# Altium PCB atmega_programmer.PcbDoc
Units mil, origin at the board's own origin, x right, y up, seen from the top; angles counter-clockwise.
Board outline 2649.21 x 2337.01 mil, 2 copper layers (Top, Bottom), stack 61.811 mil thick; 12 components, 38 nets, 110 pads, 0 vias.
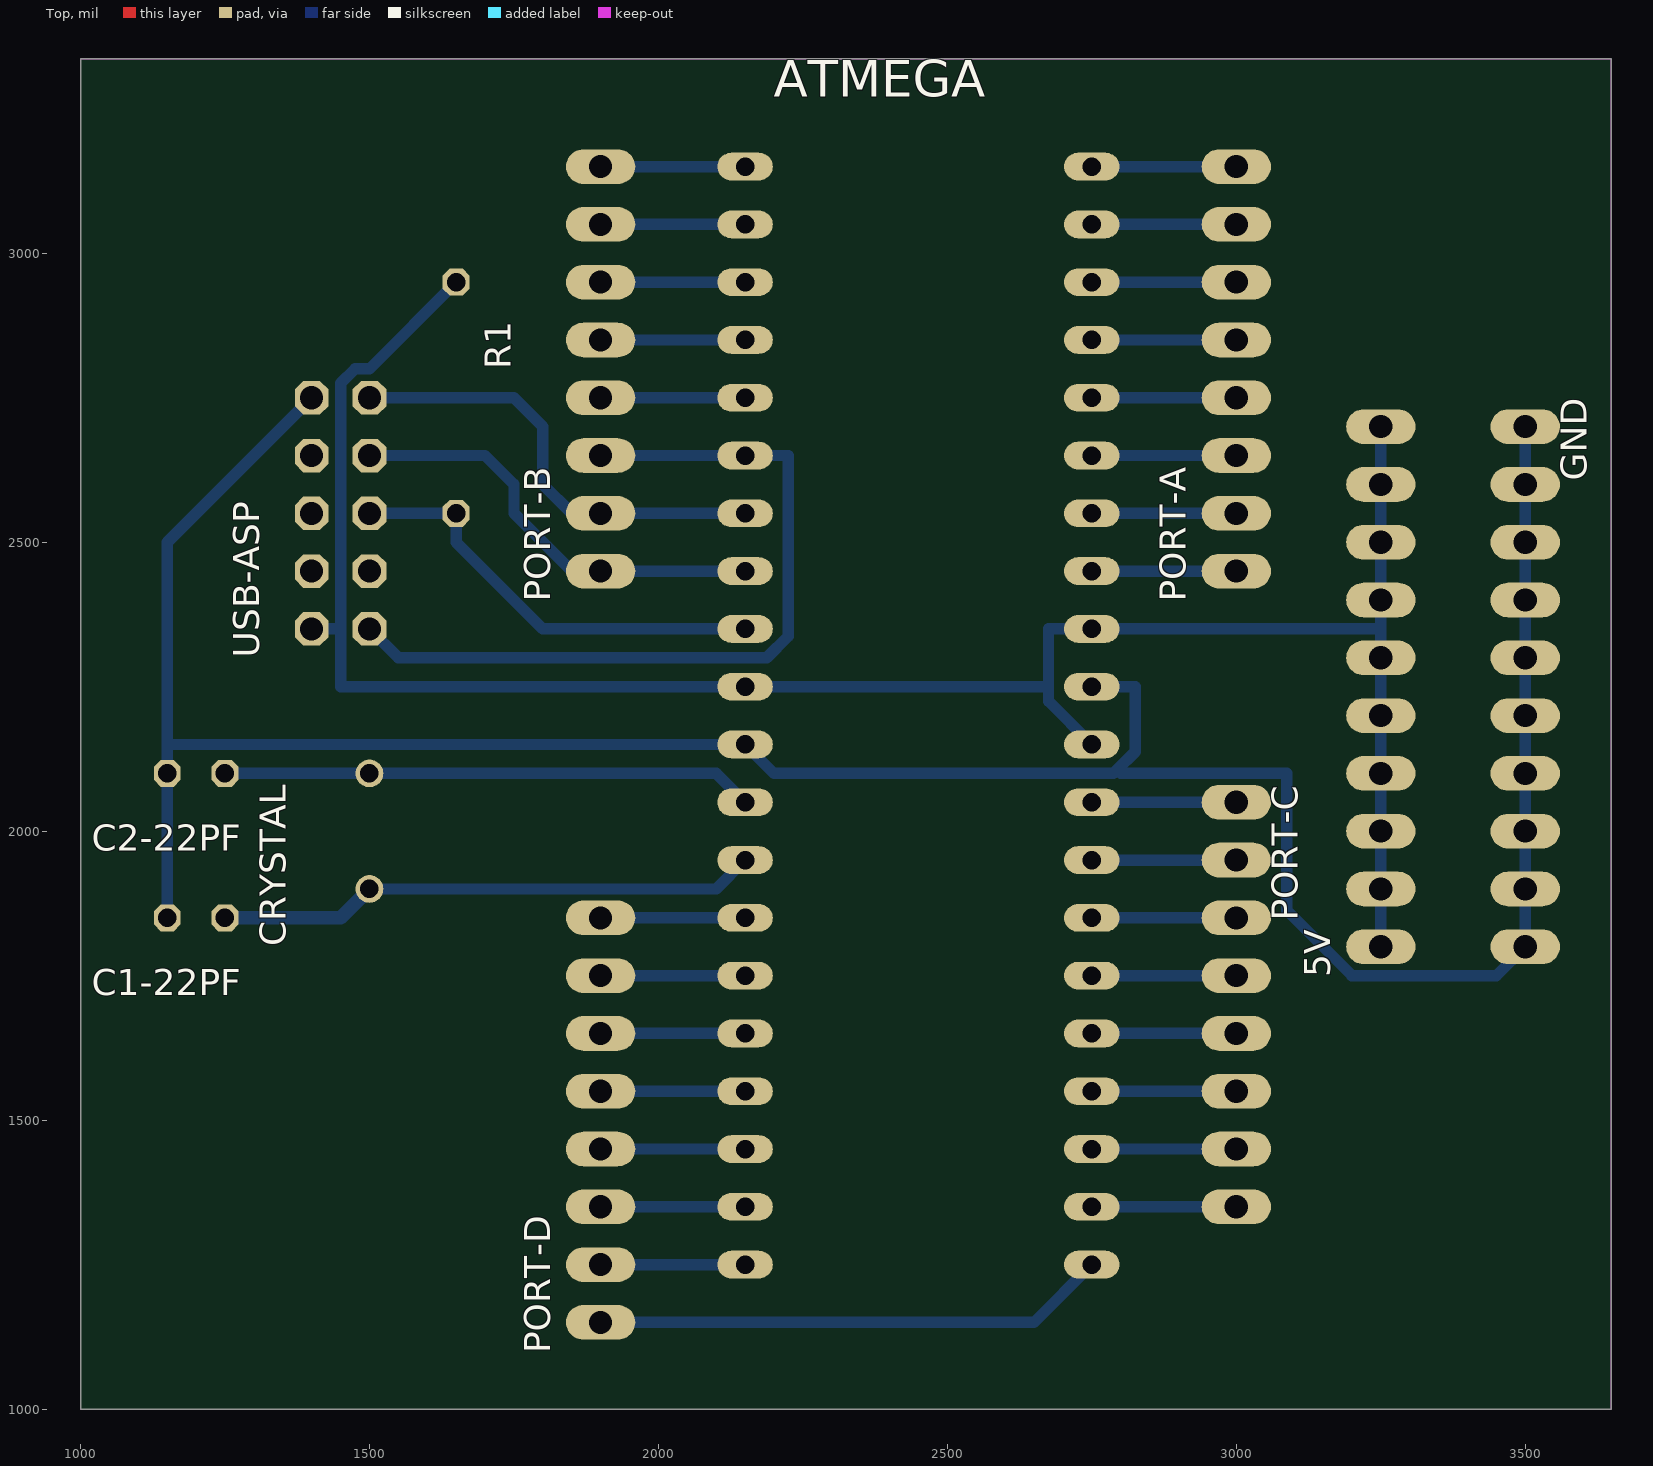
[diagram p0: Top view]
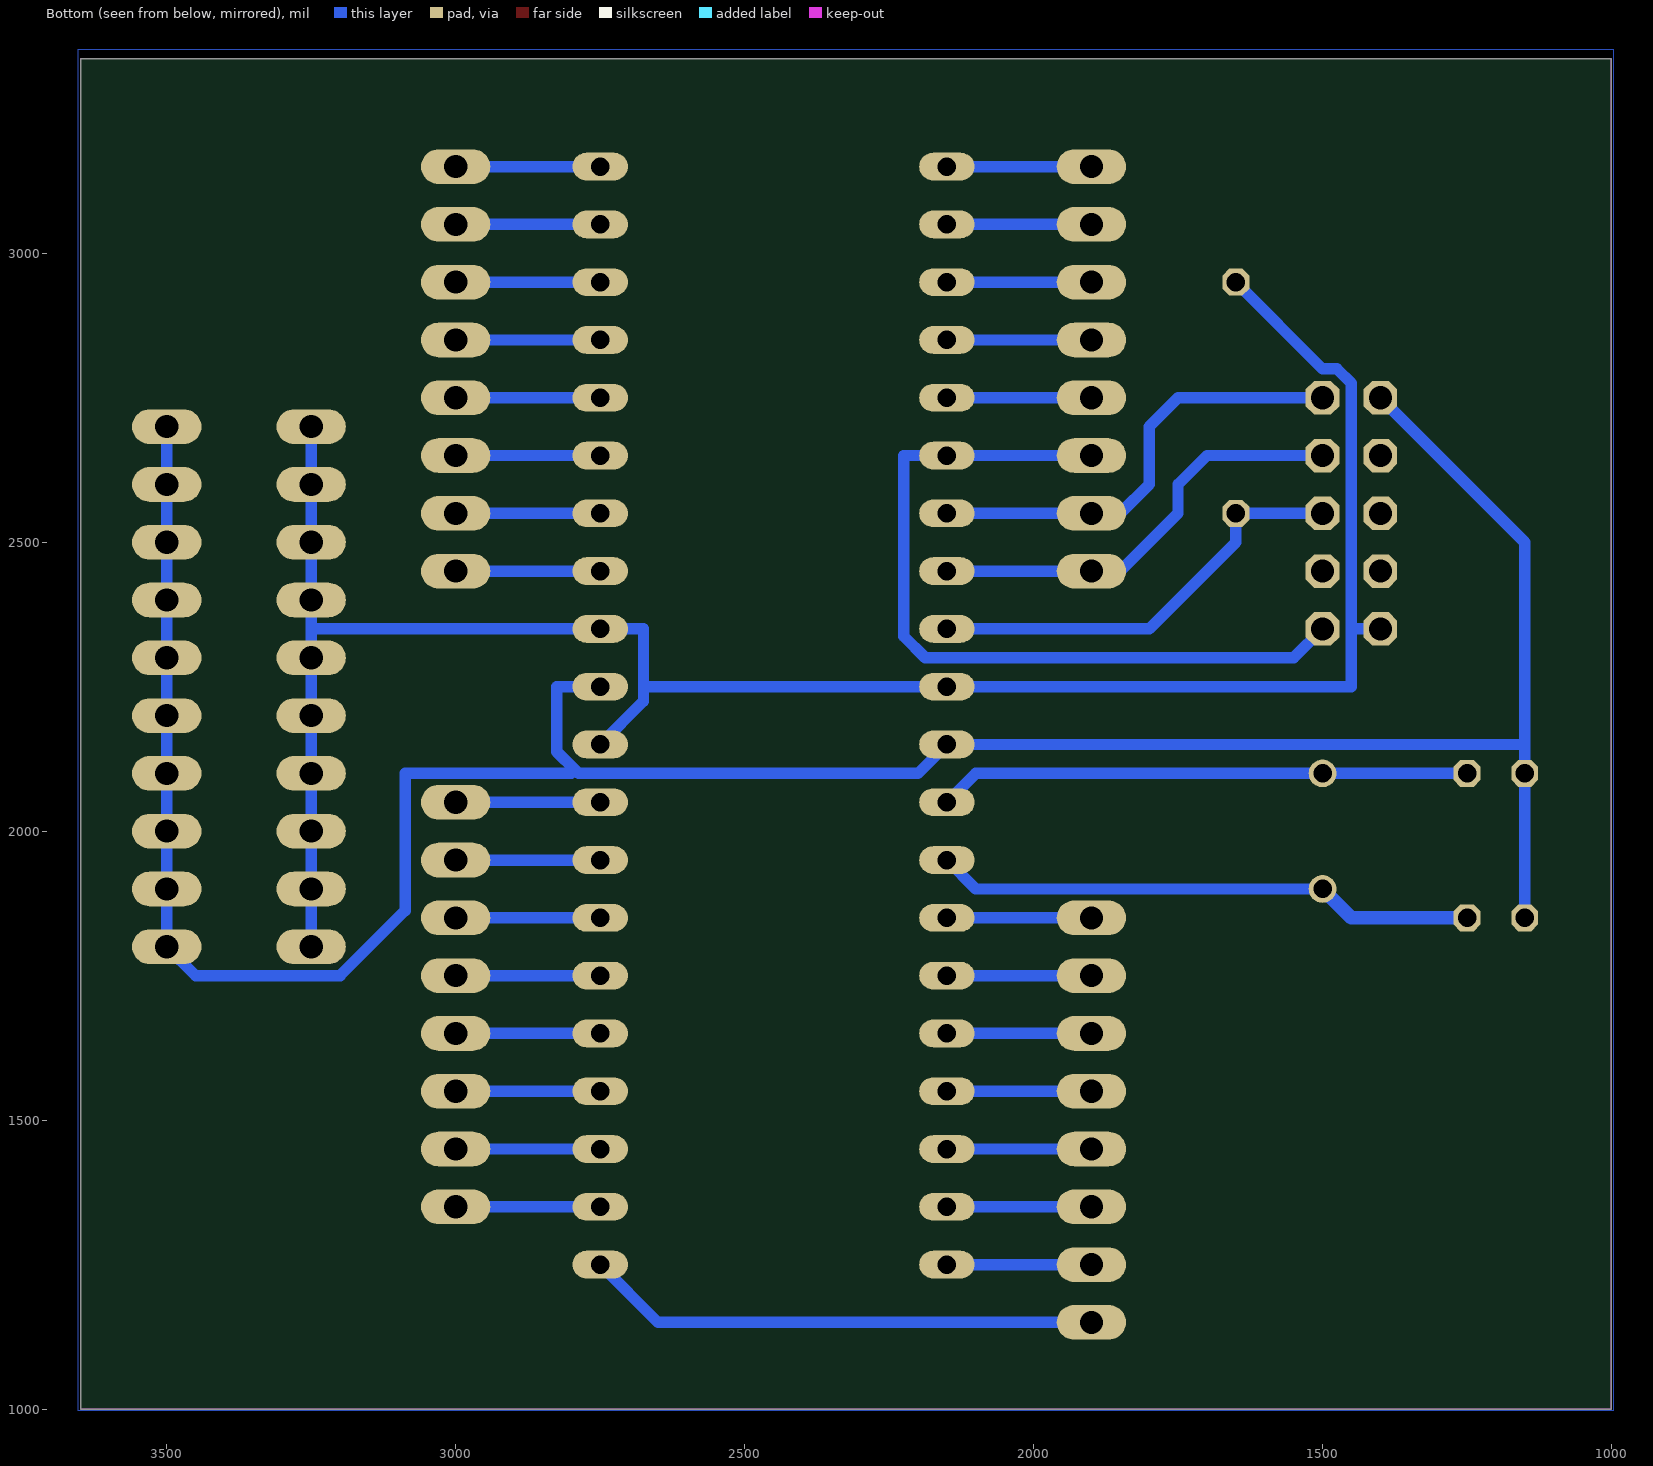
[diagram p1: Bottom view, seen from below]

## Layer stack, top to bottom
Top Solder: solder mask 0.4, Solder Resist, Dk 3.5
Top: signal copper 1.378
Dielectric 1: core 59.0551, FR-4, Dk 4.8
Bottom: signal copper 1.378
Bottom Solder: solder mask 0.4, Solder Resist, Dk 3.5

## Board outline
1000,1000 3649.21,1000 3649.21,3337.01 1000,3337.01

## Design rules (kind name [scope] priority, off if disabled: settings)
Clearance Clearance_1 [WithinRoom('vRestrict1') vs IsVia or IsThruPin] p1: gap=10 ignorepadtopadclearanceinfootprint=FALSE except(0: Arc-Hole Track-Hole SMDPad-Hole THPad-Hole Via-Hole Fill-Hole Poly-Hole Region-Hole Text-Hole)
Clearance [All] p2: gap=6 ignorepadtopadclearanceinfootprint=FALSE except(0: SMDPad-SMDPad SMDPad-THPad SMDPad-Via)
Clearance "Clearance (Same Net)" [All] p3: gap=0 ignorepadtopadclearanceinfootprint=FALSE except(6: SMDPad-SMDPad SMDPad-THPad SMDPad-Via)
HoleSize HoleSize_1 [All] p1: absolutevalues=TRUE maxlimit=100000 minlimit=13.78 maxpercent=80.000 minpercent=20.000
HoleSize [All] p2: absolutevalues=TRUE maxlimit=100 minlimit=1 maxpercent=80.000 minpercent=20.000
HoleToHoleClearance mdViaViaSameLayer [All] p1: gap=6 allowstackedmicrovias=TRUE
HoleToHoleClearance [All] p2: gap=10 allowstackedmicrovias=TRUE
PasteMaskExpansion mlMinCreamFrame [All] p1: expansion=0
PasteMaskExpansion [All] p2: expansion=0
PolygonConnect ThermalVias [IsVia] p1: connectstyle=Direct reliefconductorwidth=10 reliefentries=4 polygonreliefangle="90 Angle" airgapwidth=10
PolygonConnect [All] p2: connectstyle=Relief reliefconductorwidth=10 reliefentries=4 polygonreliefangle="90 Angle" airgapwidth=10
RoomDefinition vRestrict1 [IsVia or IsThruPin vs False] p1: confinementstyle=ConfineOut formatcopy=TRUE lockcomponents=FALSE outline 1625,1775 1625,2225 1375,2225 1375,1775
RoutingVias [All] p1: holewidth=28 width=50 viastyle="Through Hole" minholewidth=28 minwidth=50 maxholewidth=28 maxwidth=50
SilkToSilkClearance [All] p1 off: silktosilkclearance=10
SilkToSolderMaskClearance [IsPad] p1 off: minsilkscreentomaskgap=10 clearancetoexposedcopper=TRUE
SolderMaskExpansion mlMinStopFrame [All] p1: expansion=4
SolderMaskExpansion [All] p2: expansion=4
Width Width_1 [All] p1: maxlimit=100000 minlimit=19.68 preferedwidth=10
Width [All] p2: maxlimit=10 minlimit=10 preferedwidth=10
25 further rules are at their usual default settings.

## Components (designator, comment, footprint, x,y, rotation, side; value= is the part's Value field where it differs from the comment)
5V "" 1X10 3250,2250 r90 top
ATMEGA "MEGA32-P" DIL40 2450,2200 r270 top
C1-22PF "" C025-050X050 1200,1850 r180 top
C2-22PF "" C025-050X050 1200,2100 r180 top
CRYSTAL "" HC18U-V 1500,2000 r90 top
GND "" 1X10 3500,2250 r270 top
PORT-A "" 1X08 3000,2800 r90 top
PORT-B "" 1X08 1900,2800 r90 top
PORT-C "" 1X08 3000,1700 r270 top
PORT-D "" 1X08 1900,1500 r90 top
R1 "" 0207/10 1650,2750 r270 top
USB-ASP "" 2X05 1450,2550 r90 top

## Footprints (in the part's own frame and the unit in brackets; to place one, negate y for a bottom-side part, rotate by r counter-clockwise, add the part's x,y. Pads: shape width x height; smd on the part's side, far side on the other; paste and mask are expansions set on the pad)
1X08 [mil] "1X08"
  oval 60x120 hole 40: 1(-350,0) 2(-250,0) 3(-150,0) 4(-50,0) 5(50,0) 6(150,0) 7(250,0) 8(350,0)
1X10 [mil] "1X10"
  oval 60x120 hole 40: 1(-450,0) 2(-350,0) 3(-250,0) 4(-150,0) 5(-50,0) 6(50,0) 7(150,0) 8(250,0) 9(350,0) 10(450,0)
2X05 [mil] "2X05"
  oct 58.09x58.09 hole 40: 1(-200,-50) 2(-200,50) 3(-100,-50) 4(-100,50) 5(0,-50) 6(0,50) 7(100,-50) 8(100,50) 9(200,-50) 10(200,50)
0207/10 [mil] "0207/10"
  oct 46.48x46.48 hole 32: 1(-200,0) 2(200,0)
C025-050X050 [mil] "C025-050X050"
  oct 46.48x46.48 hole 32: 1(-50,0) 2(50,0)
DIL40 [mil] "DIL40"
  oval 48x96 hole 32: 1(-950,-300) 2(-850,-300) 3(-750,-300) 4(-650,-300) 5(-550,-300) 6(-450,-300) 7(-350,-300) 8(-250,-300) 9(-150,-300) 10(-50,-300) 11(50,-300) 12(150,-300) 13(250,-300) 14(350,-300) 15(450,-300) 16(550,-300) 17(650,-300) 18(750,-300) 19(850,-300) 20(950,-300) 21(950,300) 22(850,300) 23(750,300) 24(650,300) 25(550,300) 26(450,300) 27(350,300) 28(250,300) 29(150,300) 30(50,300) 31(-50,300) 32(-150,300) 33(-250,300) 34(-350,300) 35(-450,300) 36(-550,300) 37(-650,300) 38(-750,300) 39(-850,300) 40(-950,300)
HC18U-V [mil] "HC18U-V"
  round 48 hole 32: 1(-100,0) 2(100,0)

## Part data
5V GND: library part 1X10
ATMEGA: library part DIL40
C1-22PF C2-22PF: library part C025-050X050
CRYSTAL: library part HC18U-V
PORT-A PORT-B PORT-C PORT-D: library part 1X08
R1: library part 0207/10
USB-ASP: library part 2X05

## Nets (pads, with @x,y where several pads share a name; then routed paths per layer and width w, separated by ;. In a path a pad name is that pad's centre, name@x,y a point inside that pad or via, vN(x,y) a via of type N, cw(c..) or ccw(c..) an arc to the next point about the centre after c; other vN are vias at no path point)
GND: ATMEGA.11 ATMEGA.31 C1-22PF.2 C2-22PF.2 GND.1 GND.2 GND.3 GND.4 GND.5 GND.6 GND.7 GND.8 GND.9 GND.10 USB-ASP.10 | length 4815.9
  Bottom w19.69: C1-22PF.2 C2-22PF.2 1150,2150 ; USB-ASP.10 1150,2500 1150,2150 ; ATMEGA.31 2825,2250 2825,2137.5 2793.75,2106.25 ; GND.1 GND.2 GND.3 GND.4 GND.5 GND.6 GND.7 GND.8 GND.9 GND.10 3450,1750 3200,1750 3087.5,1862.5 3087.5,2100 2800,2100 2793.75,2106.25 ; 1150,2150 ATMEGA.11 2200,2100 2787.5,2100 2793.75,2106.25
MISO: ATMEGA.7 PORT-B.2 USB-ASP.9 | length 791.4
  Bottom w19.69: USB-ASP.9 1750,2750 1800,2700 1800,2600 1850,2550 PORT-B.2 ATMEGA.7
MOSI: ATMEGA.6 PORT-B.3 USB-ASP.1 | length 1398.7
  Bottom w19.69: USB-ASP.1 1550,2300 2187.5,2300 2225,2337.5 2225,2650 ATMEGA.6 PORT-B.3
N$1: 
N$2: ATMEGA.12 C2-22PF.1 CRYSTAL.2 | length 920.7
  Bottom w19.69: C2-22PF.1 CRYSTAL.2 2100,2100 ATMEGA.12
N$3: ATMEGA.13 C1-22PF.1 CRYSTAL.1 | length 941.4
  Bottom w19.69: CRYSTAL.1 2100,1900 ATMEGA.13
  Bottom w23.62: C1-22PF.1 1450,1850 CRYSTAL.1
N$8: ATMEGA.33 PORT-A.1 | length 250
  Bottom w19.69: ATMEGA.33 PORT-A.1
N$9: ATMEGA.34 PORT-A.2 | length 250
  Bottom w19.69: ATMEGA.34 PORT-A.2
N$10: ATMEGA.35 PORT-A.3 | length 250
  Bottom w19.69: ATMEGA.35 PORT-A.3
N$11: ATMEGA.36 PORT-A.4 | length 250
  Bottom w19.69: ATMEGA.36 PORT-A.4
N$12: ATMEGA.37 PORT-A.5 | length 250
  Bottom w19.69: ATMEGA.37 PORT-A.5
N$13: ATMEGA.38 PORT-A.6 | length 250
  Bottom w19.69: ATMEGA.38 PORT-A.6
N$14: ATMEGA.39 PORT-A.7 | length 250
  Bottom w19.69: ATMEGA.39 PORT-A.7
N$15: ATMEGA.40 PORT-A.8 | length 250
  Bottom w19.69: ATMEGA.40 PORT-A.8
N$16: ATMEGA.5 PORT-B.4 | length 250
  Bottom w19.69: PORT-B.4 ATMEGA.5
N$17: ATMEGA.4 PORT-B.5 | length 250
  Bottom w19.69: PORT-B.5 ATMEGA.4
N$18: ATMEGA.3 PORT-B.6 | length 250
  Bottom w19.69: PORT-B.6 ATMEGA.3
N$19: ATMEGA.2 PORT-B.7 | length 250
  Bottom w19.69: PORT-B.7 ATMEGA.2
N$20: ATMEGA.1 PORT-B.8 | length 250
  Bottom w19.69: PORT-B.8 ATMEGA.1
N$21: ATMEGA.29 PORT-C.1 | length 250
  Bottom w19.69: ATMEGA.29 PORT-C.1
N$22: ATMEGA.28 PORT-C.2 | length 250
  Bottom w19.69: ATMEGA.28 PORT-C.2
N$23: ATMEGA.27 PORT-C.3 | length 250
  Bottom w19.69: ATMEGA.27 PORT-C.3
N$24: ATMEGA.26 PORT-C.4 | length 250
  Bottom w19.69: ATMEGA.26 PORT-C.4
N$25: ATMEGA.25 PORT-C.5 | length 250
  Bottom w19.69: ATMEGA.25 PORT-C.5
N$26: ATMEGA.24 PORT-C.6 | length 250
  Bottom w19.69: ATMEGA.24 PORT-C.6
N$27: ATMEGA.23 PORT-C.7 | length 250
  Bottom w19.69: ATMEGA.23 PORT-C.7
N$28: ATMEGA.22 PORT-C.8 | length 250
  Bottom w19.69: ATMEGA.22 PORT-C.8
N$29: ATMEGA.21 PORT-D.1 | length 891.4
  Bottom w19.69: PORT-D.1 2650,1150 ATMEGA.21
N$30: ATMEGA.20 PORT-D.2 | length 250
  Bottom w19.69: PORT-D.2 ATMEGA.20
N$31: ATMEGA.19 PORT-D.3 | length 250
  Bottom w19.69: PORT-D.3 ATMEGA.19
N$32: ATMEGA.18 PORT-D.4 | length 250
  Bottom w19.69: PORT-D.4 ATMEGA.18
N$33: ATMEGA.17 PORT-D.5 | length 250
  Bottom w19.69: PORT-D.5 ATMEGA.17
N$34: ATMEGA.16 PORT-D.6 | length 250
  Bottom w19.69: PORT-D.6 ATMEGA.16
N$35: ATMEGA.15 PORT-D.7 | length 250
  Bottom w19.69: PORT-D.7 ATMEGA.15
N$36: ATMEGA.14 PORT-D.8 | length 250
  Bottom w19.69: PORT-D.8 ATMEGA.14
RESET: ATMEGA.9 R1.2 USB-ASP.5 | length 762.1
  Bottom w19.69: USB-ASP.5 R1.2 1650,2500 1800,2350 ATMEGA.9
SCK: ATMEGA.8 PORT-B.1 USB-ASP.7 | length 762.1
  Bottom w19.69: USB-ASP.7 1700,2650 1750,2600 1750,2550 1850,2450 PORT-B.1 ATMEGA.8
VCC: 5V.1 5V.2 5V.3 5V.4 5V.5 5V.6 5V.7 5V.8 5V.9 5V.10 ATMEGA.10 ATMEGA.30 ATMEGA.32 R1.1 USB-ASP.2 | length 3778.6
  Bottom w19.69: USB-ASP.2 1450,2350 ; R1.1 1500,2800 1475,2800 1450,2775 1450,2350 ; ATMEGA.30 2675,2225 2675,2250 ; 5V.1 5V.2 5V.3 5V.4 5V.5 5V.6 3250,2350 ; 5V.10 5V.9 5V.8 5V.7 3250,2350 ; 1450,2350 1450,2250 ATMEGA.10 2675,2250 ; 2675,2250 2675,2350 ATMEGA.32 3250,2350
pads on no net: USB-ASP.3 USB-ASP.4 USB-ASP.6 USB-ASP.8

## Polygon pours and split planes (outlines as drawn)
N$1 on Bottom "Bottom-N$1" (solid, remove dead copper, pour order 0): 997,997 3653,997 3653,3353 997,3353

## Keep-outs
Keep-Out Layer:
  the board outline again, w0

## Silkscreen, mask and mechanical layers (free items; w line width, h text height)
Dimension:
  the board outline again, w0